# EAGLE board v1 (EAGLE 7.0.0)
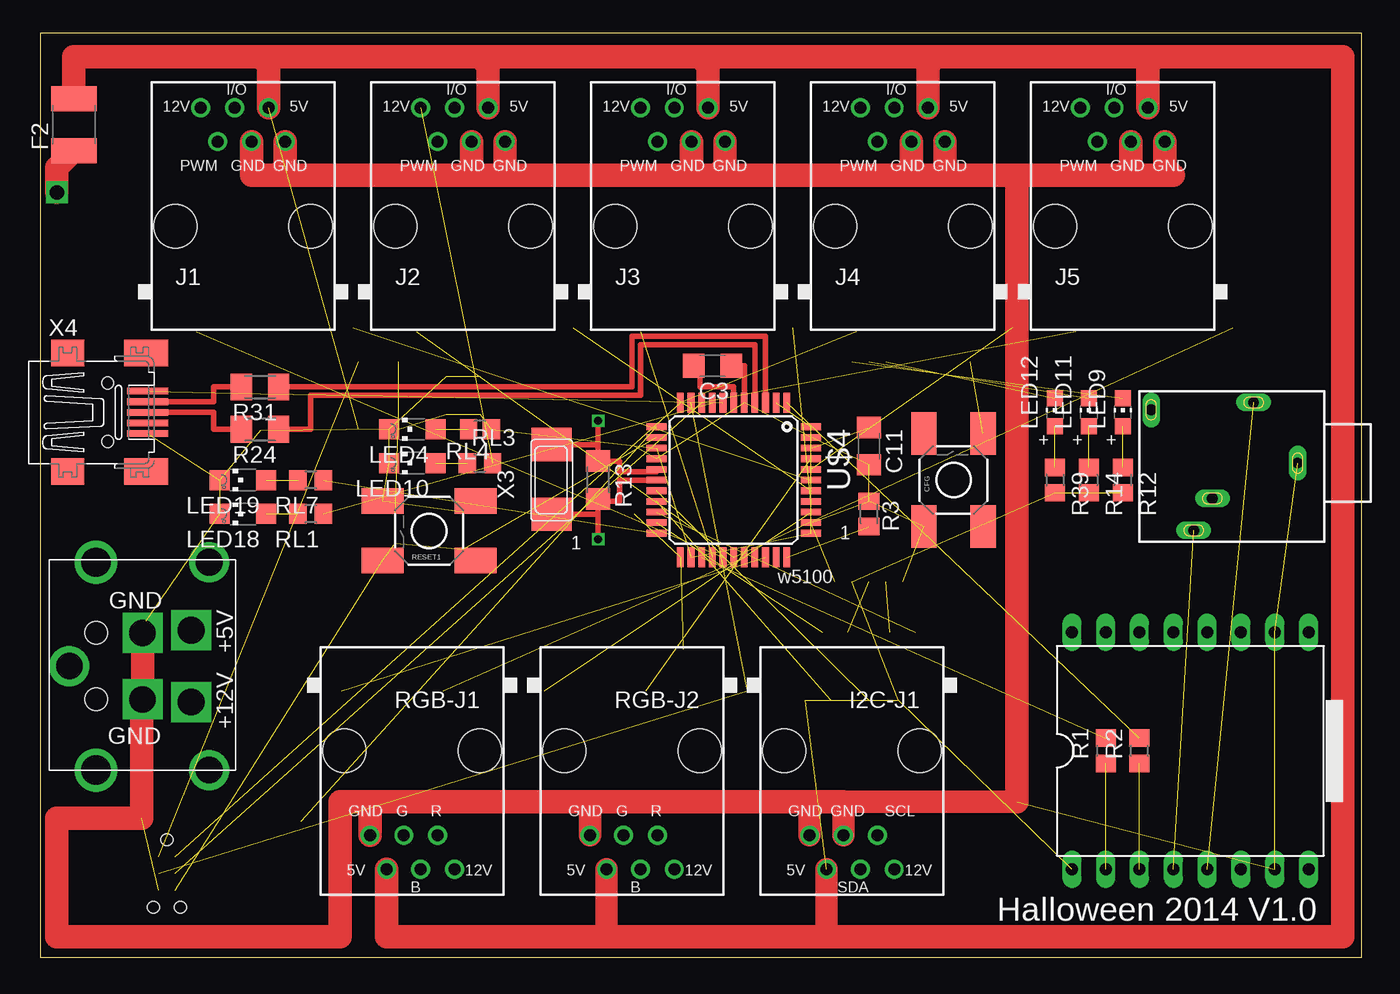
[diagram p0: board, top side]
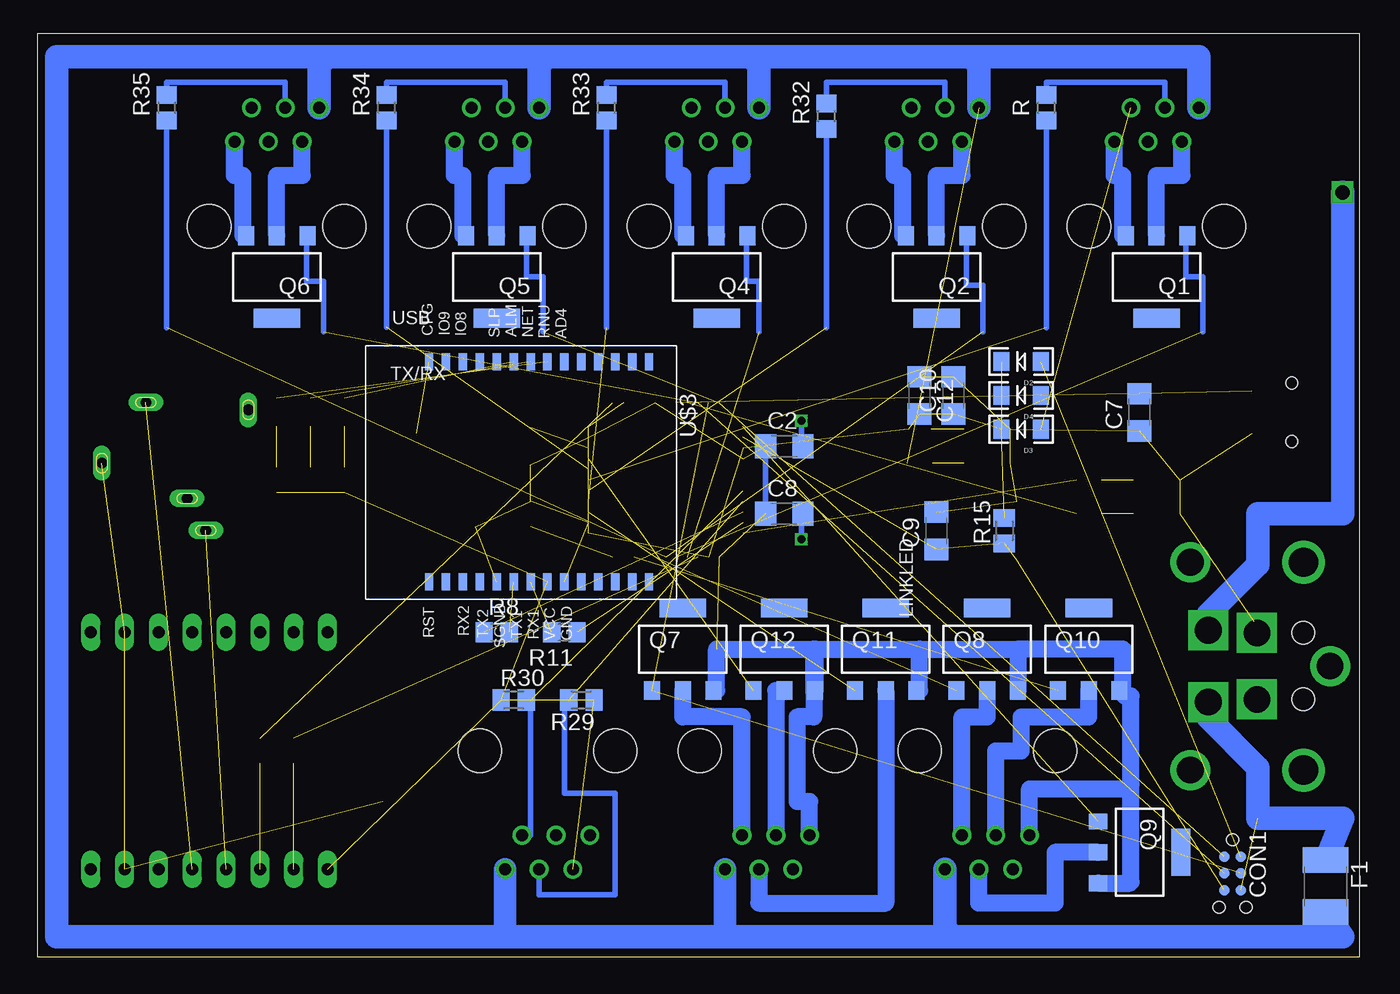
[diagram p1: board, bottom side, seen from below]

Size 99.24 x 69.33 mm. Coordinates in mm from the lower left corner, seen from the top.
Outline: 0,0 99.24,0 99.24,69.33 0,69.33 0,0
Copper layers (1*16): Top 0.035mm / dielectric 1.5mm / Bottom 0.035mm
Design rules "Fusion_eagle_rule_v1.1": minimum track width 6mil, minimum drill 12mil, track to track 6mil, track to pad 6mil, pad to pad 6mil, via to via 6mil, smd to smd 0mil, copper to edge 10mil, drill to drill 10mil, minimum pad ring 10mil, minimum via ring 6mil, stop-mask expansion 2mil, vias tented up to drill 100mil, thermal gap 10mil
Net classes: 0 default: width 0.406 mm; 1 power: width 0.457 mm; 2 VIN: width 0.457 mm; 3 fine: width 0.406 mm; 4 aref: width 0.406 mm
bKeepout: area -1.3,54.9 to 114.3,82.8; area -7.6,52.3 to 108,80.3
tRestrict: area 0,47.2 to 95.2,68.8
bRestrict: area 0,47.2 to 95.2,68.8
vRestrict: area 44.5,28.2 to 59.7,32; area 44.5,29.5 to 48.3,43.4; area 55.9,30.7 to 59.7,43.4; area 44.5,39.6 to 59.7,43.4

## Footprints (pad centres in the part's own frame; a part is rotated, then mirrored left to right if it is on the bottom)
C1206 = smd 1.6 x 1.8: 1 -1.4,0; 2 1.4,0
TACTILE_SWITCH_SMD = smd 3.175 x 1.905: 1 -3.493,2.223; 2 3.493,2.223; 3 -3.493,-2.223; 4 3.493,-2.223
TC2030-MCP-NL = smd 0.787 x 0.787: 5V 1.27,0.635; GND 3.81,0.635; MISO 1.27,-0.635; MOSI 2.54,0.635; RESET 3.81,-0.635; SCK 2.54,-0.635 | hole 0.889: 0,0; 5.08,-1.016; 5.08,1.016
LED-1206 = smd 1.2 x 1.4: A -1.5,0; C 1.5,0
C1812 = smd 1.9 x 3.4: 1 -1.95,0; 2 1.95,0
RJ12-STRAIGHT-I2C = drill 0.9 pad 1.4: +5V 1.905,8.89; +12V -3.175,8.89; GND1 3.175,6.35; GND2 0.635,6.35; SCL -1.905,6.35; SDA -0.635,8.89 | hole 3.251: -5.08,0; 5.08,0
RJ12-STRAIGHT = drill 0.9 pad 1.4: +5V 1.905,8.89; +12V -3.175,8.89; GND1 3.175,6.35; GND2 0.635,6.35; I/O -0.635,8.89; PWM -1.905,6.35 | hole 3.251: -5.08,0; 5.08,0
CHIPLED_1206 = smd 1.5 x 1.5: A 0,-1.75; C 0,1.75
CHIP-LED0805 = smd 1.2 x 1.2: A 0,-1.05; C 0,1.05
PG-SOT-223 = smd 1.2 x 1.4: 1 -2.311,-3.099; 2 0,-3.099; 3 2.311,-3.099 | smd 3.5 x 1.4: 4 0,3.099
R0805 = smd 1.3 x 1.5: 1 -0.95,0; 2 0.95,0
M0805 = smd 1.3 x 1.6: 1 -0.95,0; 2 0.95,0
R1206 = smd 1.6 x 1.803: 1 -1.422,0; 2 1.422,0
M1206 = smd 1.6 x 2: 1 -1.4,0; 2 1.4,0
RJ12-STRAIGHT-RGB = drill 0.9 pad 1.4: +5V 1.905,8.89; +12V -3.175,8.89; B -0.635,8.89; G 0.635,6.35; GND1 3.175,6.35; R -1.905,6.35 | hole 3.251: -5.08,0; 5.08,0
R0805' = smd 1.3 x 1.5: 1 -0.85,0; 2 0.85,0
DIL16-7 = drill 0.9 long: 1 -8.89,-8.89; 2 -6.35,-8.89; 3 -3.81,-8.89; 4 -1.27,-8.89; 5 1.27,-8.89; 6 3.81,-8.89; 7 6.35,-8.89; 8 8.89,-8.89; 9 8.89,8.89; 10 6.35,8.89; 11 3.81,8.89; 12 1.27,8.89; 13 -1.27,8.89; 14 -3.81,8.89; 15 -6.35,8.89; 16 -8.89,8.89
SZ05-ZIGBEE3 = smd 1.27 x 0.635: AD1 -7.62,6.35; AD2 -7.62,5.08; AD3 -7.62,3.81; AD4 -7.62,2.54; ALM -7.62,-1.27; C485 -7.62,-3.81; CFG -7.62,-7.62; GND 8.89,2.54; IO1 -7.62,8.89; IO2 -7.62,7.62; IO3 8.89,8.89; IO4 8.89,7.62; IO5 8.89,6.35; IO6 8.89,5.08; IO7 8.89,3.81; IO8 -7.62,-5.08; IO9 -7.62,-6.35; MS 8.89,-6.35; NET -7.62,0; RST 8.89,-7.62; RUN -7.62,1.27; RX1 8.89,0; RX2 8.89,-5.08; SLD -7.62,-2.54; SND 8.89,-2.54; TX1 8.89,-1.27; TX2 8.89,-3.81; VCC 8.89,1.27
TQFP44 = smd 1.5 x 0.5: 1 -5.8,4; 2 -5.8,3.2; 3 -5.8,2.4; 4 -5.8,1.6; 5 -5.8,0.8; 6 -5.8,0; 7 -5.8,-0.8; 8 -5.8,-1.6; 9 -5.8,-2.4; 10 -5.8,-3.2; 11 -5.8,-4; 23 5.8,-4; 24 5.8,-3.2; 25 5.8,-2.4; 26 5.8,-1.6; 27 5.8,-0.8; 28 5.8,0; 29 5.8,0.8; 30 5.8,1.6; 31 5.8,2.4; 32 5.8,3.2; 33 5.8,4 | smd 0.5 x 1.5: 12 -4,-5.8; 13 -3.2,-5.8; 14 -2.4,-5.8; 15 -1.6,-5.8; 16 -0.8,-5.8; 17 0,-5.8; 18 0.8,-5.8; 19 1.6,-5.8; 20 2.4,-5.8; 21 3.2,-5.8; 22 4,-5.8; 34 4,5.8; 35 3.2,5.8; 36 2.4,5.8; 37 1.6,5.8; 38 0.8,5.8; 39 0,5.8; 40 -0.8,5.8; 41 -1.6,5.8; 42 -2.4,5.8; 43 -3.2,5.8; 44 -4,5.8
KPJX-4S-S = drill 2 square: +5V 2.7,1.35; +12V -2.7,1.35; GND1 -2.5,5; GND2 2.5,5 | drill 2: P$1 -7.8,0; P$2 7.8,0; P$11 0,10.5 | drill 2.2: P$3 -7.8,8.5; P$4 7.8,8.5 | hole 1.7: -2.5,8.5; 2.5,8.5
1503_09 = drill 0.8 pad 1.2 long: 1 0,-2.1; 2 -4.55,-5.4; 3 5.05,-9.9; 4 -4,-13.1; 5 2.65,-8.5
NX6035 = smd 2.5 x 3: P$1 2.665,0; P$2 -2.565,0
32005-201 = smd 3.1 x 0.5: 1 3,1.6; 2 3,0.8; 3 3,0; 4 3,-0.8; 5 3,-1.6 | smd 2.5 x 2: M1 -3,-4.45; M2 -3,4.45 | smd 3.3 x 2: M3 2.9,4.45; M4 2.9,-4.45 | hole 0.9: 0,2.2; 0,-2.2

## Placement (x,y rotation side)
C2  22pF  [C1206]  43.18,38.35 0 bottom
C3  100nF  [C1206]  50.48,44.39 180 top
C7  10uF  [C1206]  16.51,40.89 90 bottom
C8  22pF  [C1206]  43.18,33.27 0 bottom
C9  100nF  [C1206]  31.75,32 90 bottom
C10  10uF  [C1206]  30.48,42.16 90 bottom
C11  100nF  [C1206]  62.23,38.35 270 top
C12  100nF  [C1206]  33.02,42.16 270 bottom
CFG  Configure  [TACTILE_SWITCH_SMD]  68.58,35.81 90 top
CON1  SPI  [TC2030-MCP-NL]  9.53,8.83 270 bottom
D2  1N581D1206  [LED-1206]  25.4,44.7 180 bottom
D3  1N581D1206  [LED-1206]  25.4,39.62 180 bottom
D4  1N581D1206  [LED-1206]  25.4,42.16 180 bottom
F1  0.5A  [C1812]  2.54,5.33 270 bottom
F2  0.5A  [C1812]  2.54,62.48 90 top
I2C-J1  RJ12STRAIGHT-I2C  [RJ12-STRAIGHT-I2C]  60.96,15.49 180 top
J1  RJ12  [RJ12-STRAIGHT]  15.24,54.86 0 top
J2  RJ12  [RJ12-STRAIGHT]  31.75,54.86 0 top
J3  RJ12  [RJ12-STRAIGHT]  48.26,54.86 0 top
J4  RJ12  [RJ12-STRAIGHT]  64.77,54.86 0 top
J5  RJ12  [RJ12-STRAIGHT]  81.28,54.86 0 top
LED4  RED  [CHIPLED_1206]  27.94,39.62 90 top
LED9  RED  [CHIP-LED0805]  81.28,40.89 0 top
LED10  RED  [CHIPLED_1206]  27.94,37.08 90 top
LED11  RED  [CHIP-LED0805]  78.74,40.89 0 top
LED12  RED  [CHIP-LED0805]  76.2,40.89 0 top
LED18  Blue  [CHIPLED_1206]  15.24,33.27 90 top
LED19  Blue  [CHIPLED_1206]  15.24,35.81 90 top
Q1  BSP75  [PG-SOT-223]  15.24,51.05 180 bottom
Q2  BSP75  [PG-SOT-223]  31.75,51.05 180 bottom
Q4  BSP75  [PG-SOT-223]  48.26,51.05 180 bottom
Q5  BSP75  [PG-SOT-223]  64.77,51.05 180 bottom
Q6  BSP75  [PG-SOT-223]  81.28,51.05 180 bottom
Q7  BSP75  [PG-SOT-223]  50.8,23.11 0 bottom
Q8  BSP75  [PG-SOT-223]  27.94,23.11 0 bottom
Q9  BSP75  [PG-SOT-223]  16.51,7.87 270 bottom
Q10  BSP75  [PG-SOT-223]  20.32,23.11 0 bottom
Q11  BSP75  [PG-SOT-223]  35.56,23.11 0 bottom
Q12  BSP75  [PG-SOT-223]  43.18,23.11 0 bottom
R  1k  [R0805]  23.5,63.75 90 bottom
R1  1k  [R0805]  80.01,15.49 90 top
R2  1k  [R0805]  82.55,15.49 90 top
R3  10k  [M0805]  62.23,33.27 270 top
R8  1K  [R0805]  64.77,24.38 0 bottom
R11  1K  [R0805]  59.69,24.38 180 bottom
R12  1K  [R0805]  81.28,35.81 270 top
R13  1M  [R1206]  41.91,35.81 270 top
R14  1K  [R0805]  78.74,35.81 270 top
R15  10k  [M0805]  26.67,32 90 bottom
R24  22  [M1206]  16.51,39.62 180 top
R29  10K  [M0805]  58.42,19.3 180 bottom
R30  10K  [M0805]  63.5,19.3 0 bottom
R31  22  [M1206]  16.51,42.8 180 top
R32  1k  [R0805]  40.01,63.12 90 bottom
R33  1k  [R0805]  56.52,63.75 90 bottom
R34  1k  [R0805]  73.03,63.75 90 bottom
R35  1k  [R0805]  89.53,63.75 90 bottom
R39  1K  [R0805]  76.2,35.81 270 top
RESET1  Reset uC  [TACTILE_SWITCH_SMD]  29.21,32 180 top
RGB-J1  RJ12  [RJ12-STRAIGHT-RGB]  27.94,15.49 180 top
RGB-J2  RJ12  [RJ12-STRAIGHT-RGB]  44.45,15.49 180 top
RL1  1K  [R0805]  20.32,33.27 180 top
RL3  1K  [R0805]  33.02,37.08 0 top
RL4  1K  [R0805']  33.02,39.62 180 top
RL7  1K  [R0805]  20.32,35.81 180 top
U$1  DFPLAYER_AUDIO  [DIL16-7]  86.36,15.49 0 top
U$3  SZ05-ZIGBEESMD  [SZ05-ZIGBEE3]  62.23,37.08 270 bottom
U$4  ATMEGA32U4-AU  [TQFP44]  52.07,35.81 270 top
U$6  KPJX-4S-S  [KPJX-4S-S]  12.7,21.84 90 top
X1  1503_09  [1503_09]  96.52,37.08 270 top
X3  16MHz  [NX6035]  38.42,35.81 90 top
X4  MINI-USB  [32005-201]  5.08,40.89 0 top

## Library data of the parts
C2 C3 C7-C12 R R1 R2 R8 R11-R14 R32-R35 R39 RL1 RL3 RL7 = rcl
CFG CON1 D2-D4 F1 F2 I2C-J1 J1-J5 RESET1 RGB-J1 RGB-J2 U$1 U$3 U$6 X3 = lpatiny
LED4 LED9-LED12 LED18 LED19 U$4 = adafruit
Q1 Q2 Q4-Q12 = infineon; OC_FARNELL: unknown; OC_NEWARK: unknown
R3 R15 R24 R29-R31 RL4 = resistor
X1 = con-lumberg; OC_FARNELL: 1243244; OC_NEWARK: unknown
X4 = con-cypressindustries; OC_FARNELL: unknown; OC_NEWARK: unknown

## Nets
+5V [power]: D3.A F2.2 I2C-J1.+5V J1.+5V J2.+5V J3.+5V J4.+5V J5.+5V R12.2 R14.2 R29.1 R30.1 R39.2 RGB-J1.+5V RGB-J2.+5V U$1.1 U$3.VCC
+5V/1 [fine]: C10.1 C12.2 D2.C D3.C D4.C R15.2 RL4.1 U$4.2 U$4.14 U$4.24 U$4.34 U$4.44
+12V [power]: F1.2 I2C-J1.+12V J1.+12V J2.+12V J3.+12V J4.+12V J5.+12V RGB-J1.+12V RGB-J2.+12V RL3.2
A1: R33.1 U$4.37
A2: R32.1 U$4.38
A3: R.1 U$4.39
A4: R34.1 U$4.40
A5: Q12.1 U$4.41
AREF: C11.1 U$4.42
D4*: R1.2 U$4.25
D5*: Q10.1 U$4.31
D6*: Q1.1 U$4.27
D7*: R2.2 U$4.1
D8*: Q2.1 R35.1 U$4.28
D9*: Q8.1 U$4.29
D10*: U$4.30
D11*: Q9.1 U$4.12
D12*: Q4.1 U$4.26
D13*: U$4.32
D18*: Q11.1 U$4.36
D+USB: R24.2 X4.3
D-USB: R31.2 X4.2
GND [power]: C2.1 C3.1 C7.1 C8.1 C9.2 C10.2 C11.2 C12.1 CFG.1 CON1.GND I2C-J1.GND1 I2C-J1.GND2 J1.GND1 J1.GND2 J2.GND1 J2.GND2 J3.GND1 J3.GND2 J4.GND1 J4.GND2 J5.GND1 J5.GND2 LED4.C LED10.C LED18.C LED19.C Q1.3 Q2.3 Q4.3 Q5.3 Q6.3 Q7.3 Q8.3 Q9.3 Q10.3 Q11.3 Q12.3 R3.1 RESET1.4 RGB-J1.GND1 RGB-J2.GND1 U$1.7 U$1.10 U$3.GND U$3.SND U$4.5 U$4.15 U$4.23 U$4.35 U$4.43 U$6.GND1 U$6.GND2 X1.1 X4.5
GND1 [VIN]: LED9.C U$3.RUN
GND2 [VIN]: LED11.C U$3.NET
GND3 [VIN]: LED12.C U$3.ALM
HWB: R3.2 U$4.33
ISP+5V: CON1.5V D2.A
MISO: CON1.MISO Q5.1 U$4.11
MOSI: CON1.MOSI Q7.1 U$4.10
N$1: J3.PWM Q4.2
N$2: J2.I/O R32.2
N$3: R1.1 U$1.2
N$5: J4.PWM Q5.2
N$6 [aref]: Q10.2 RGB-J1.G
N$7: J3.I/O R33.2
N$8: LED18.A RL1.2
N$9: U$1.5 X1.2
N$10 [aref]: Q11.2 RGB-J2.B
N$11: R11.2 U$3.RX1
N$12: LED4.A RL4.2
N$13: R2.1 U$1.3
N$14: LED19.A RL7.2
N$15: U$1.4 X1.3
N$16: C3.2 U$4.6
N$18: J1.I/O R.2
N$19: J5.PWM Q6.2
N$20 [aref]: Q7.2 RGB-J2.R
N$23 [aref]: Q12.2 RGB-J2.G
N$24: R8.2 U$3.TX1
N$25: LED9.A R12.1
N$26: LED11.A R14.1
N$27: LED12.A R39.1
N$28: J2.PWM Q2.2
N$29: J4.I/O R34.2
N$32: J5.I/O R35.2
N$34: J1.PWM Q1.2
N$35: CFG.4 U$3.CFG
N$38: F2.1 U$6.+5V
N$39: F1.1 U$6.+12V
N$42: C8.2 R13.2 U$4.17 X3.P$2
N$50 [aref]: Q9.2 RGB-J1.B
N$68 [aref]: Q8.2 RGB-J1.R
N$75: LED10.A RL3.1
RD+: R24.1 U$4.4
RD-: R31.1 U$4.3
RESET: C9.1 CON1.RESET R15.1 RESET1.2 U$4.13
RX: R8.1 U$4.20
RXLED: RL1.1 U$4.8
SCK: CON1.SCK Q6.1 U$4.9
SCL: I2C-J1.SCL R30.2 U$4.18
SDA: I2C-J1.SDA R29.2 U$4.19
TX: R11.1 U$4.21
TXLED: RL7.1 U$4.22
VUSB: C7.2 D4.A U$4.7 X4.1
XTAL1: C2.2 R13.1 U$4.16 X3.P$1

## Tracks (layer width: path | path; a pad name or v marks a point on that pad's centre or on a via)
+5V  (8 unrouted)
  Top 1.676: I2C-J1.+5V 59.05,1.52 | RGB-J2.+5V 42.55,1.52
  Top 1.778: F2.2 2.54,67.56 16.51,67.56 | 16.51,67.56 33.02,67.56 | 33.02,67.56 49.53,67.56 | 49.53,67.56 67.31,67.56 | 67.31,67.56 83.82,67.56 | 83.82,67.56 97.79,67.56 97.79,1.52 59.05,1.52 42.55,1.52 26.04,1.52 RGB-J1.+5V | J1.+5V 17.14,66.93 16.51,67.56 | J2.+5V 33.66,66.93 33.02,67.56 | J3.+5V 50.16,66.93 49.53,67.56 | J4.+5V 66.67,66.93 67.31,67.56 | J5.+5V 83.19,66.93 83.82,67.56
+5V/1  (11 unrouted)
+12V  (1 unrouted)
  Bottom 1.676: I2C-J1.+12V 64.14,1.52 | RGB-J2.+12V 47.62,1.52
  Bottom 1.778: F1.2 1.27,1.52 30.48,1.52 | 30.48,1.52 47.62,1.52 64.14,1.52 97.79,1.52 97.79,67.56 77.47,67.56 | 77.47,67.56 60.96,67.56 | 60.96,67.56 45.72,67.56 | 45.72,67.56 29.21,67.56 | 29.21,67.56 12.06,67.56 J1.+12V | J3.+12V 45.09,66.93 45.72,67.56 | J4.+12V 61.59,66.93 60.96,67.56 | J5.+12V 78.11,66.93 77.47,67.56 | J2.+12V 28.57,66.93 29.21,67.56 | RGB-J1.+12V 31.11,2.16 30.48,1.52
A1  (1 unrouted)
  Bottom 0.406: R33.1 56.52,47.24
A2  (1 unrouted)
  Bottom 0.406: R32.1 40.01,47.24
A3  (1 unrouted)
  Bottom 0.406: R.1 23.5,47.24
A4  (1 unrouted)
  Bottom 0.406: R34.1 73.03,47.29
A5  (1 unrouted)
AREF  (1 unrouted)
D4*  (1 unrouted)
D5*  (1 unrouted)
D6*  (1 unrouted)
  Bottom 0.406: Q1.1 13.02,54.15 13.02,51.05 11.75,51.05 11.75,46.93
D7*  (1 unrouted)
D8*  (2 unrouted)
  Bottom 0.406: R35.1 89.53,47.24 | Q2.1 29.53,54.15 29.53,50.42 28.26,50.42 28.26,46.93
D9*  (1 unrouted)
D11*  (1 unrouted)
D12*  (1 unrouted)
  Bottom 0.406: Q4.1 46.04,54.15 46.04,50.74 45.09,50.74 45.09,46.93
D18*  (1 unrouted)
D+USB
  Top 0.406: X4.3 13.02,40.89 13.02,39.62 R24.2
D-USB
  Top 0.406: X4.2 13.02,41.69 13.02,42.8 R31.2
GND  (25 unrouted)
  Top 0.406: C3.1 52.87,44.39 U$4.5
  Top 0.457: 7.92,25.2 U$6.GND2
  Top 1.676: I2C-J1.GND1 57.78,11.68 | I2C-J1.GND2 60.33,11.68 73.34,11.68 | RGB-J2.GND1 41.27,11.68
  Top 1.778: 24.13,11.68 22.54,11.68 22.54,1.52 1.27,1.52 1.27,10.41 7.62,10.41 7.62,19.26 U$6.GND1 U$6.GND2 | 24.13,11.68 41.27,11.68 57.78,11.68 60.33,11.68 | 73.34,11.68 73.34,58.67 | 81.28,58.67 85.09,58.67 84.45,59.31 J5.GND1 | 81.28,58.67 73.34,58.67 | 73.34,58.67 68.58,58.67 | 68.58,58.67 64.77,58.67 | 64.77,58.67 50.8,58.67 | 50.8,58.67 48.26,58.67 | 48.26,58.67 35.56,58.67 | 35.56,58.67 31.75,58.67 | 31.75,58.67 17.78,58.67 | 17.78,58.67 15.88,58.67 J1.GND2 | J1.GND1 18.41,59.31 17.78,58.67 | J2.GND2 32.38,59.31 31.75,58.67 | J2.GND1 34.92,59.31 35.56,58.67 | J3.GND2 48.9,59.31 48.26,58.67 | J3.GND1 51.44,59.31 50.8,58.67 | J4.GND2 65.41,59.31 64.77,58.67 | J4.GND1 67.94,59.31 68.58,58.67 | J5.GND2 81.92,59.31 81.28,58.67 | RGB-J1.GND1 24.77,11.05 24.13,11.68
  Bottom 0.406: C2.1 C8.1
  Bottom 0.457: 17.37,23.32 17.78,23.11
  Bottom 1.27: Q2.3 34.29,54.15 34.29,58.67 34.92,58.67 J2.GND1 | Q4.3 50.8,54.15 50.8,58.67 51.44,58.67 J3.GND1 | Q5.3 67.31,54.15 67.31,58.67 67.94,58.67 J4.GND1 | Q6.3 83.82,54.15 83.82,58.67 84.45,58.67 J5.GND1 | Q1.3 17.78,54.15 17.78,58.67 18.41,58.67 J1.GND1 | 25.63,23.11 17.78,23.11 17.78,20.02 Q10.3 17.62,19.62 17.14,19.62 17.14,12.95 | 25.63,23.11 Q8.3 | Q9.3 17.23,5.56 17.14,5.65 17.14,12.95 | RGB-J1.GND1 24.77,12.64 17.46,12.64 17.14,12.95 | Q7.3 48.26,20.02 48.26,23.11 40.96,23.11 | 40.96,23.11 40.87,23.11 | 40.87,23.11 Q12.3 40.96,20.02 40.96,23.11 | Q11.3 33.02,20.02 33.02,23.11 | 33.02,23.11 25.63,23.11 | 40.87,23.11 33.02,23.11 | RGB-J2.GND1 41.27,11.68 42.23,11.68 42.23,18.03 40.96,18.03 40.96,19.94
GND1  (1 unrouted)
GND2  (1 unrouted)
GND3  (1 unrouted)
HWB  (1 unrouted)
ISP+5V  (1 unrouted)
MISO  (2 unrouted)
  Bottom 0.406: Q5.1 62.55,54.15 62.55,51.05 61.28,51.05 61.28,46.93
MOSI  (2 unrouted)
N$1
  Bottom 1.27: Q4.2 48.26,58.67 46.35,58.67 J3.PWM
N$2
  Bottom 0.406: J2.I/O 31.11,65.66 40.01,65.66 R32.2
N$3  (1 unrouted)
N$5
  Bottom 1.27: Q5.2 64.77,58.67 62.87,58.67 J4.PWM
N$6
  Bottom 1.27: Q10.2 20.32,18.03 25.4,18.03 25.4,15.49 27.3,15.49 RGB-J1.G
N$7
  Bottom 0.406: J3.I/O 47.62,65.66 56.52,65.66 R33.2
N$8  (1 unrouted)
N$9  (1 unrouted)
N$10
  Bottom 1.27: RGB-J2.B 45.09,4.06 35.56,4.06 Q11.2
N$11  (1 unrouted)
N$12  (1 unrouted)
N$13  (1 unrouted)
N$14  (1 unrouted)
N$15  (1 unrouted)
N$16
  Top 0.406: C3.2 49.53,44.39 | 49.53,44.39 49.53,44.7 | 49.53,44.39 49.53,42.8 52.07,42.8 U$4.6
N$18
  Bottom 0.406: J1.I/O 14.61,65.66 23.5,65.66 R.2
N$19
  Bottom 1.27: Q6.2 81.28,58.67 79.38,58.67 J5.PWM
N$20
  Bottom 1.27: RGB-J2.R 46.35,18.03 50.8,18.03 Q7.2
N$23
  Bottom 1.27: Q12.2 43.81,20.02 RGB-J2.G
N$24  (1 unrouted)
N$25  (1 unrouted)
N$26  (1 unrouted)
N$27  (1 unrouted)
N$28
  Bottom 1.27: Q2.2 31.75,58.67 29.84,58.67 J2.PWM
N$29
  Bottom 0.406: J4.I/O 64.14,65.66 73.03,65.66 R34.2
N$32
  Bottom 0.406: J5.I/O 80.64,65.66 89.53,65.66 R35.2
N$34
  Bottom 1.27: Q1.2 15.24,58.67 13.34,58.67 J1.PWM
N$35  (1 unrouted)
N$38  (via drill 1.1)
  Top 1.778: v1.27,57.4 1.27,59.26 F2.1
  Bottom 1.778: U$6.+5V 11.35,25.73 7.62,29.46 7.62,33.27 1.27,33.27 v1.27,57.4
N$39
  Bottom 1.778: U$6.+12V 11.35,17.95 7.62,14.22 7.62,10.41 1.27,10.41 F1.1
N$42  (via drill 0.6)
  Top 0.406: U$4.17 43.5,35.81 43.5,34.23 41.91,34.23 R13.2 41.91,33.25 | X3.P$2 41.91,33.25 | 41.91,33.25 v41.91,31.37
  Bottom 0.406: v41.91,31.37 41.91,33.14 C8.2
N$50
  Bottom 1.27: Q9.2 22.86,7.87 22.86,4.06 28.57,4.06 RGB-J1.B
N$68
  Bottom 1.27: RGB-J1.R 29.84,18.03 27.94,18.03 Q8.2
N$75  (1 unrouted)
RD+
  Top 0.406: R24.1 20.32,39.62 20.32,42.16 45.09,42.16 45.09,45.97 53.67,45.97 U$4.4
RD-
  Top 0.406: R31.1 44.45,42.8 44.45,46.61 54.47,46.61 U$4.3
RESET  (4 unrouted)
RX  (1 unrouted)
RXLED  (1 unrouted)
SCK  (2 unrouted)
  Bottom 0.406: Q6.1 79.06,54.15 79.06,50.74 77.79,50.74 77.79,46.93
SCL  (1 unrouted)
  Bottom 0.406: I2C-J1.SCL 62.23,9.14 62.23,19.3 R30.2
SDA  (1 unrouted)
  Bottom 0.406: I2C-J1.SDA 61.59,4.7 55.88,4.7 55.88,12.32 59.69,12.32 59.69,19.3 R29.2
TX  (1 unrouted)
TXLED  (1 unrouted)
VUSB  (3 unrouted)
XTAL1  (via drill 0.6)
  Top 0.406: U$4.16 46.27,36.45 43.5,36.45 43.5,37.24 R13.1 41.91,38.48 | X3.P$1 41.91,38.48 | 41.91,38.48 v41.91,40.26
  Bottom 0.406: v41.91,40.26 41.91,38.48 C2.2

## Text on the board
tNames: 1 | 1 | w5100 | Halloween 2014 V1.0
bNames: USB | TX/RX | LINKLED
203bmp: C:/Users/G/Pictures/logo_epfl.bmp